# EAGLE board ESP32-COMPACT-VER_v55 (EAGLE 9.7.0)
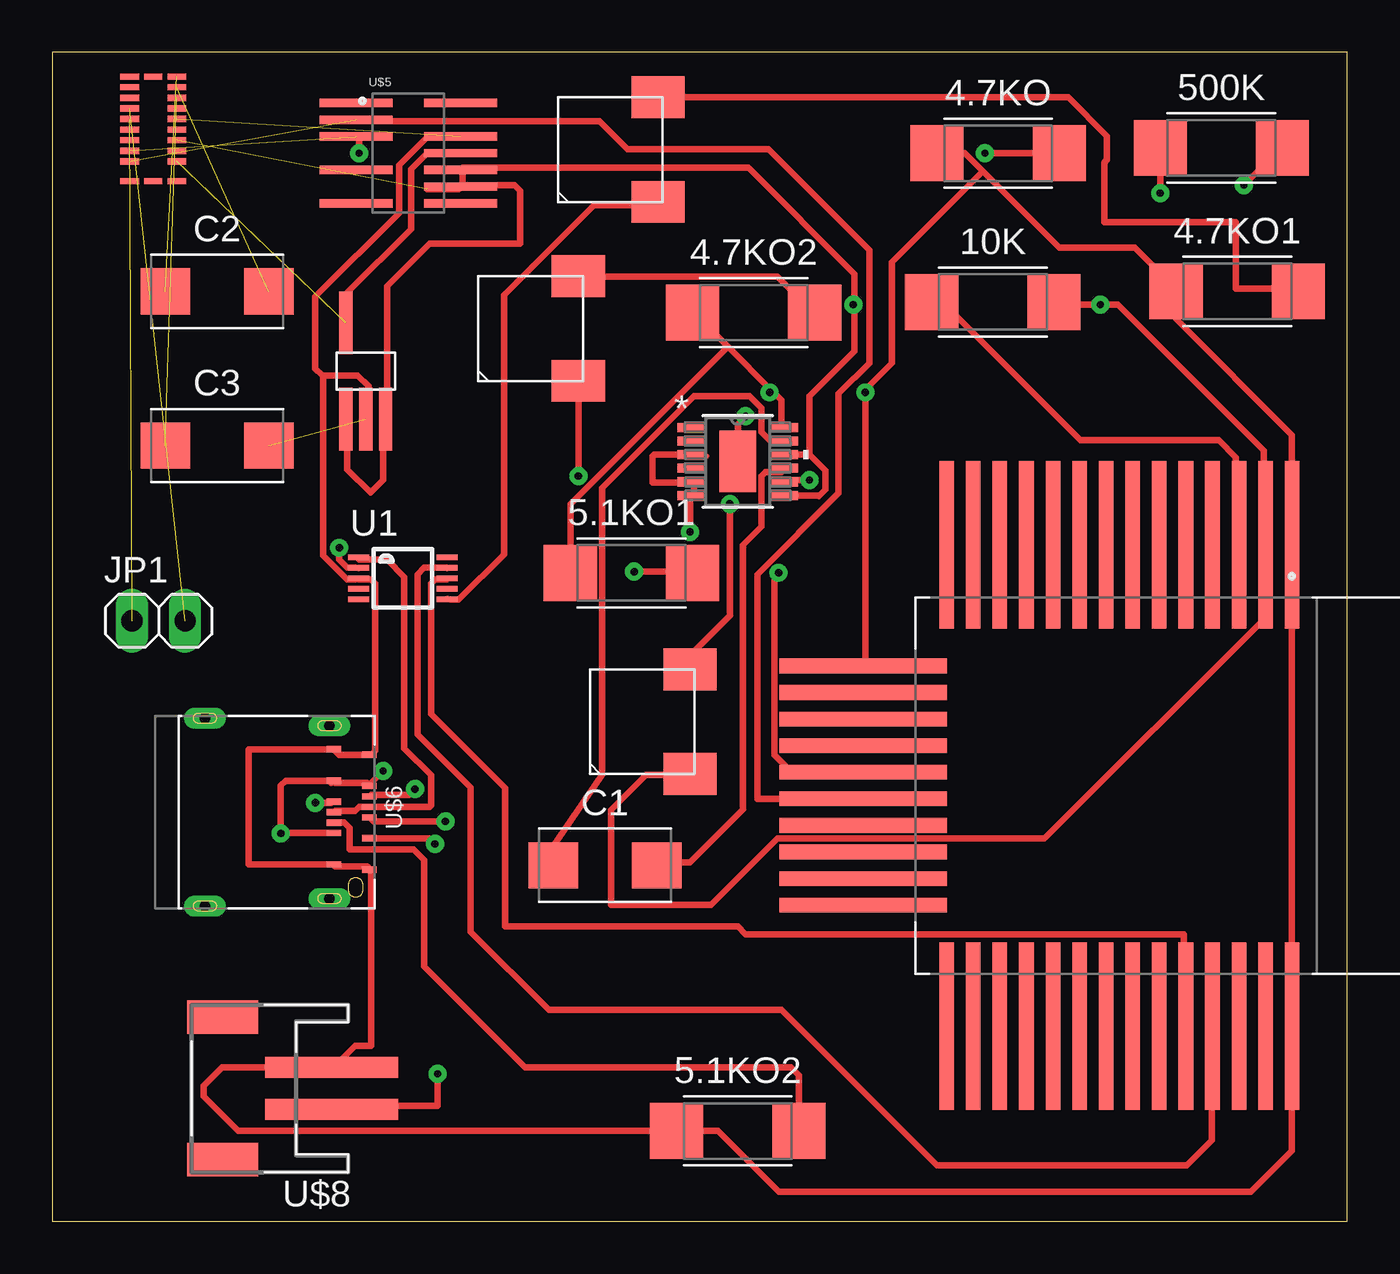
[diagram p0: board, top side]
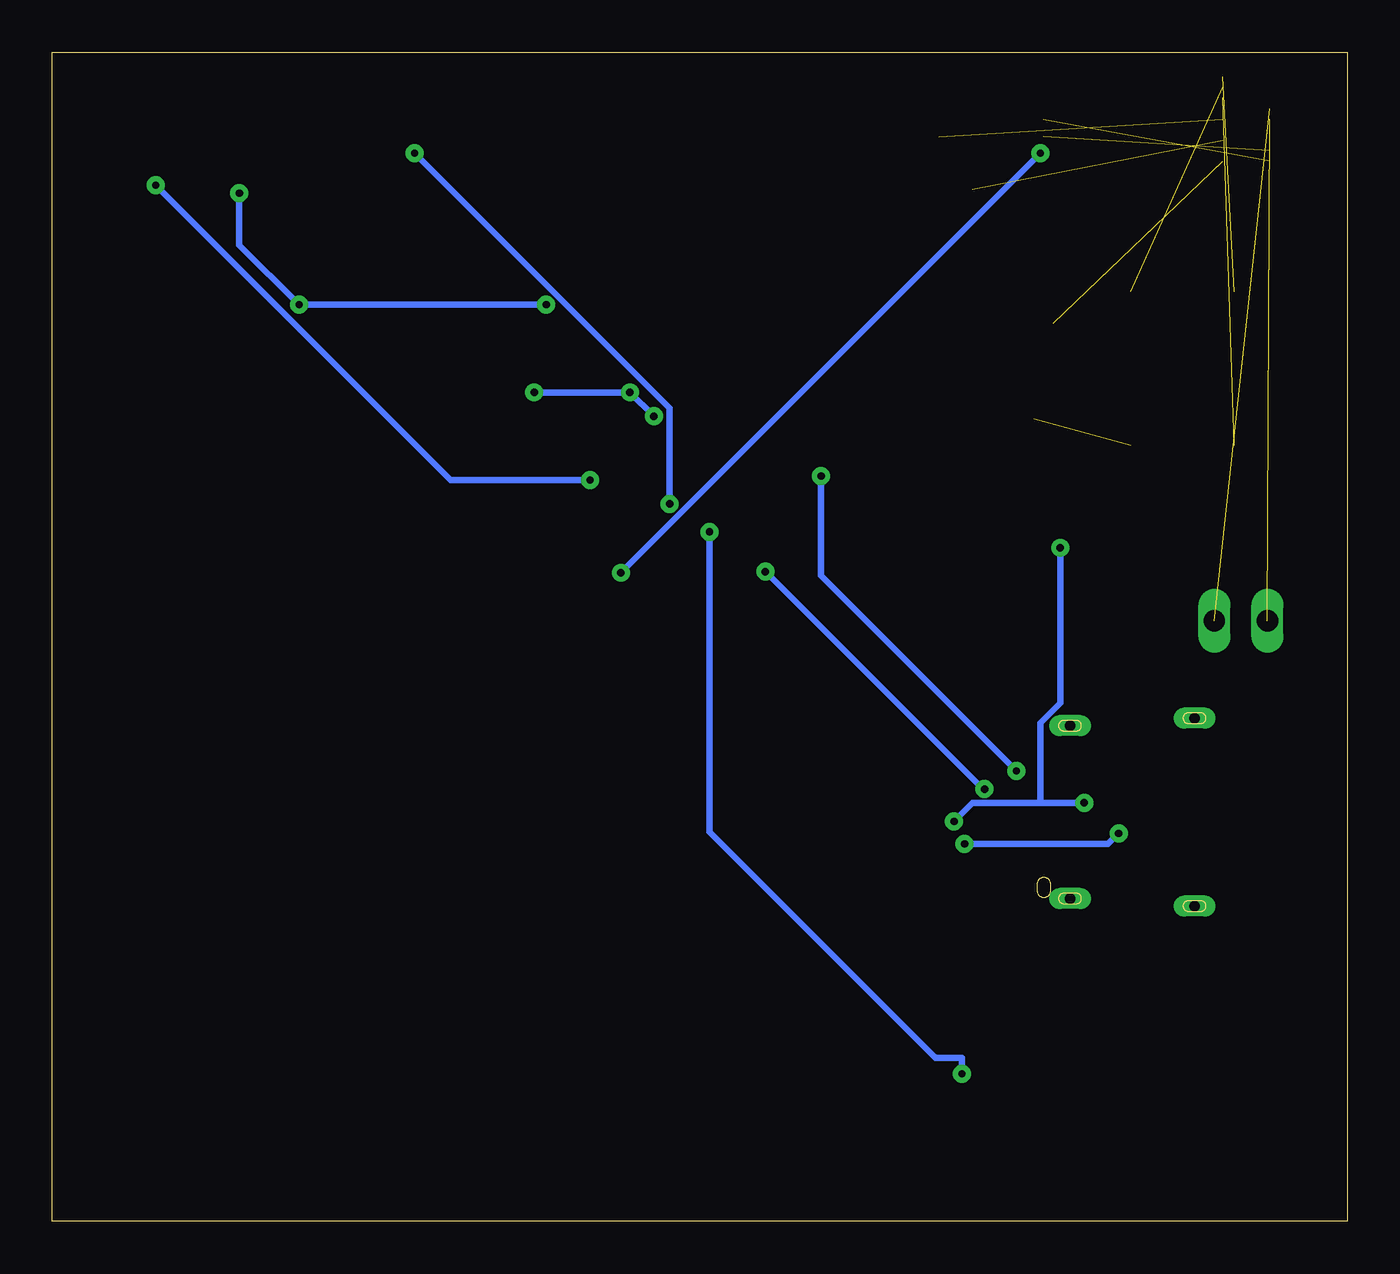
[diagram p1: board, bottom side, seen from below]

Size 61.9 x 55.88 mm. Coordinates in mm from the lower left corner, seen from the top.
Outline: 0,0 61.9,0 61.9,55.88 0,55.88 0,0
Copper layers (1*16): Top 0.035mm / dielectric 1.5mm / Bottom 0.035mm
Design rules "default *": minimum track width 3mil, minimum drill 0.35mm, track to track 3mil, track to pad 3mil, pad to pad 3mil, via to via 3mil, smd to smd 3mil, copper to edge 40mil, drill to drill 6mil, minimum pad ring 10mil, minimum via ring 10mil, stop-mask expansion 4mil, vias tented up to drill 0mil, thermal gap 10mil
Net classes: 0 default: width 0.305 mm

## Footprints (pad centres in the part's own frame; a part is rotated, then mirrored left to right if it is on the bottom)
5025-WIDENED-RESISTOR = smd 2.54 x 2.67: 1 -2.921,0; 2 2.921,0
CAPM6032X280 = smd 2.368 x 2.204: 1 -2.471,0; 2 2.471,0
1X02 = drill 1.016 long: 1 -1.27,0; 2 1.27,0
MSOP10 = smd 1 x 0.25: 1 -2.113,1; 2 -2.113,0.5; 3 -2.113,0; 4 -2.113,-0.5; 5 -2.113,-1; 6 2.113,-1; 7 2.113,-0.5; 8 2.113,0; 9 2.113,0.5; 10 2.113,1
MSOP-12_MSE = smd 1.397 x 0.432: 1 -2.184,1.626; 2 -2.184,0.975; 3 -2.184,0.325; 4 -2.184,-0.325; 5 -2.184,-0.975; 6 -2.184,-1.626; 7 2.184,-1.626; 8 2.184,-0.975; 9 2.184,-0.325; 10 2.184,0.325; 11 2.184,0.975; 12 2.184,1.626 | smd 1.753 x 2.946: 13 0,0
ESP32-WROOM-32 = smd 8 x 0.7: 1 -11.5,5.26; 3V3 -11.5,3.99; EN -11.5,2.72; GND 11.5,5.26; IO0 11.5,-11.25; IO4 11.5,-9.98; IO5 11.5,-6.17; IO12 -11.5,-11.25; IO14 -11.5,-9.98; IO16 11.5,-8.71; IO17 11.5,-7.44; IO18 11.5,-4.9; IO19 11.5,-3.63; IO21 11.5,-1.09; IO22 11.5,2.72; IO23 11.5,3.99; IO25 -11.5,-6.17; IO26 -11.5,-7.44; IO27 -11.5,-8.71; IO32 -11.5,-3.63; IO33 -11.5,-4.9; IO34 -11.5,-1.09; IO35 -11.5,-2.36; NC 11.5,-2.36; RX 11.5,0.18; SENSOR_VN -11.5,0.18; SENSOR_VP -11.5,1.45; TX 11.5,1.45 | smd 0.7 x 8: CLK 0.635,-15.25; CMD -0.635,-15.25; GND2 -5.715,-15.25; IO2 5.715,-15.25; IO13 -4.445,-15.25; IO15 4.445,-15.25; SD0 1.905,-15.25; SD1 3.175,-15.25; SD2 -3.175,-15.25; SD3 -1.905,-15.25
NJM12888 = smd 0.635 x 3: CTRL 0.95,-2.3; GND 0,-2.3; VIN -0.95,-2.3; VOUT -0.95,2.3
5MM-SQUARED-LED = smd 2.54 x 2: P$1 2.286,-2.5; P$2 2.286,2.5
MAX30102-WIDENED = smd 3.5 x 0.4: 1 -2.5,2.4; 5 -2.5,-0.8; 7 -2.5,-2.4; 8 2.5,-2.4; 14 2.5,2.4; GND 2.5,0.8; SCL -2.5,1.6; SDA -2.5,0.8; VDD 2.5,0; VLED1 2.5,-0.8; VLED2 2.5,-1.6
TYPE-C-MIN = smd 0.3 x 0.7: A1 -2.75,5; A4 -1.25,5; A5 -0.75,5; A6 -0.25,5; A7 0.25,5; A9 1.25,5; A12 2.75,5; B1 2.5,3.3; B4 1,3.3; B5 0.5,3.3; B6 0,3.3; B7 -0.5,3.3; B9 -1.5,3.3; B12 -3,3.3 | drill 0.5 pad 0.8 long: SH1 -4.13,3.09; SH2 4.13,3.09; SH3 4.49,-2.86; SH4 -4.49,-2.86
JSTPH2 = smd 1 x 6.35: GND 1,-3.7; VDD -1,-3.7 | smd 1.6 x 3.4: NC1 -3.4,1.5; NC2 3.4,1.5
MAX86150 = smd 0.9 x 0.3: C1_N 1.13,1.519; C1_P 1.13,2.025; ECG_N -1.13,0.506; ECG_P -1.13,0; GND_ANALOG 1.13,0.506; GND_DIGITAL 1.13,0; INTB -1.13,-1.012; P$1 -1.13,2.025; P$2 -1.13,1.012; P$4 -1.13,1.519; P$14 -1.13,-0.506; P$20 -1.13,-2.975; P$21 1.13,-2.975; PGND 1.13,-0.506; SCL -1.13,-2.025; SDA -1.13,-1.519; VDD_ANALOG 1.13,-1.519; VDD_DIGITAL 1.13,-2.025; VLED 1.13,-1.012; VREF 1.13,1.012 | smd 0.85 x 0.3: P$19 0,-2.975; P$27 0,2.025

## Placement (x,y rotation side)
4.7KO  5025-WIDENEDRESISTOR  [5025-WIDENED-RESISTOR]  45.21,51.05 0 top
4.7KO1  5025-WIDENEDRESISTOR  [5025-WIDENED-RESISTOR]  56.64,44.45 0 top
4.7KO2  5025-WIDENEDRESISTOR  [5025-WIDENED-RESISTOR]  33.53,43.43 0 top
5.1KO1  5025-WIDENEDRESISTOR  [5025-WIDENED-RESISTOR]  27.69,30.99 0 top
5.1KO2  5025-WIDENEDRESISTOR  [5025-WIDENED-RESISTOR]  32.77,4.32 0 top
10K  5025-WIDENEDRESISTOR  [5025-WIDENED-RESISTOR]  44.96,43.94 0 top
500K  5025-WIDENEDRESISTOR  [5025-WIDENED-RESISTOR]  55.88,51.31 0 top
C1  1uF  [CAPM6032X280]  26.42,17.02 0 top
C2  1uF  [CAPM6032X280]  7.87,44.45 0 top
C3  1uF  [CAPM6032X280]  7.87,37.08 0 top
JP1  PINHD-1X2  [1X02]  5.08,28.7 0 top
U1  CH340ESMD  [MSOP10]  16.76,30.73 0 top
U2  LTC3245IMSETRPBF  [MSOP-12_MSE]  32.77,36.32 0 top
U$1  ESP32-WROOM-32  [ESP32-WROOM-32]  54,20.83 270 top
U$2  NJM12888  [NJM12888]  14.99,40.64 0 top
U$3  5MM-SQUARED-LED  [5MM-SQUARED-LED]  26.67,51.23 0 top
U$4  5MM-SQUARED-LED  [5MM-SQUARED-LED]  22.86,42.67 0 top
U$5  MAX30102  [MAX30102-WIDENED]  17.02,51.05 0 top
U$6  TYPE-C-MIN  [TYPE-C-MIN]  10.16,19.56 270 top
U$7  5MM-SQUARED-LED  [5MM-SQUARED-LED]  28.19,23.88 0 top
U$8  JSTPH2-WIDE  [JSTPH2]  9.65,6.35 90 top
U$9  MAX86150  [MAX86150]  4.83,52.69 0 top

## Library data of the parts
4.7KO 4.7KO1 4.7KO2 5.1KO1 5.1KO2 10K 500K U$1-U$9 = esp32-component-libraries
C1-C3 = Capacitor; CATEGORY: Capacitor
JP1 = Connector; CATEGORY: CONNECTOR; SUB-CATEGORY: PIN-HEADER
U1 = CH340E
U2 = LTC3245IMSETRPBF; MANUFACTURER_PART_NUMBER: ltc3245imse#trpbf; VENDOR: Linear Technology

## Nets
GND: 4.7KO1.1 4.7KO2.1 4.7KO.1 5.1KO1.1 5.1KO2.1 C3.2 U1.3 U2.12 U2.13 U$1.1 U$1.GND U$1.GND2 U$2.GND U$5.GND U$6.A1 U$6.A12 U$6.B1 U$6.B12 U$8.GND U$9.GND_DIGITAL
N$1: 10K.2 500K.1 U2.7 U2.10 U$1.3V3 U$2.CTRL U$2.VIN U$5.VLED1 U$5.VLED2 U$7.P$1 U$9.VLED
N$2: U1.9 U$1.TX
N$3: U1.8 U$1.RX
N$4: 4.7KO.2 U$7.P$2
N$5: U$1.CLK U$5.SCL U$9.SCL
N$6: 10K.1 U$1.EN
N$7: U$1.CMD U$5.SDA U$9.SDA
N$8: C2.1 U$9.C1_P
N$9: U1.6 U$3.P$1
N$10: 4.7KO1.2 U$3.P$2
N$11: U1.1 U$6.A6 U$6.B6
N$12: 4.7KO2.2 U$4.P$2
N$13: U1.2 U$6.A7 U$6.B7
N$14: U2.3 U2.5 U2.6 U$8.VDD
N$15: C1.2 U2.9
N$16: C1.1 U2.11
N$17: 500K.2 U2.8
N$18: U$4.P$1 U$6.A4 U$6.A9 U$6.B4 U$6.B9
N$19: 5.1KO2.2 U$6.B5
N$20: 5.1KO1.2 U$6.A5
N$21: C2.2 U$9.C1_N
N$22: U$2.VOUT U$5.VDD U$9.VDD_DIGITAL
N$23: C3.1 U$9.VREF
N$24: JP1.2 U$9.ECG_N
N$25: JP1.1 U$9.ECG_P
V3: U1.10
VCC: U1.7

## Tracks (layer width: path | path; a pad name or v marks a point on that pad's centre or on a via)
GND  (via drill 0.35)  (2 unrouted)
  Top 0.305: U$5.GND 19.43,51.82 17.91,51.82 16.57,50.48 16.57,48.2 12.57,44.2 12.57,40.77 12.92,40.42 | 12.92,40.42 12.95,40.39 12.95,31.81 14.1,30.67 14.48,30.67 U1.3 14.67,30.67 15.24,30.67 15.43,30.48 15.43,22.48 15.24,22.29 U$6.A1 15.05,22.29 13.72,22.29 13.53,22.48 U$6.B12 9.4,22.56 9.4,17.06 U$6.B1 13.53,16.95 15.05,16.95 U$6.A12 15.24,16.76 15.24,8.38 14.48,8.38 13.53,7.43 U$8.GND 8.14,7.35 8.13,7.37 7.24,6.48 7.24,5.97 8.89,4.32 5.1KO2.1 31.81,4.32 34.74,1.4 57.29,1.41 59.25,3.37 59.25,9.31 U$1.GND 59.25,9.34 59.25,32.19 U$1.1 59.25,32.38 59.25,37.59 53.72,43.12 4.7KO1.1 53.72,44.58 51.75,46.55 48.13,46.55 44.48,50.2 | 32.29,41.81 30.67,43.43 4.7KO2.1 | 32.29,41.81 34.38,39.72 | 34.38,39.72 34.86,39.24 34.86,38.1 U2.12 | 5.1KO1.1 24.77,34.29 32.29,41.81 | U2.13 32.77,38.1 v33.15,38.48 | v34.29,39.62 34.38,39.72 | 4.7KO.1 43.62,51.05 44.48,50.2 | 44.48,50.2 40.13,45.85 40.13,41.02 38.86,39.75 v38.86,39.62 38.86,26.67 U$1.GND2 | 12.92,40.42 14.61,40.42 15.11,39.91 15.11,38.47 U$2.GND
  Bottom 0.305: v33.15,38.48 v34.29,39.62 v38.86,39.62
N$1  (via drill 0.35)  (1 unrouted)
  Top 0.305: U$2.VIN 14.1,38.29 14.1,35.94 15.21,34.83 15.81,35.43 15.81,38.29 U$2.CTRL 16,38.48 16,44.7 18.03,46.74 22.35,46.74 22.35,49.28 22.1,49.53 19.62,49.53 | 36.2,36.64 36.29,36.54 36.96,35.88 36.96,34.99 36.64,34.67 36.61,34.7 U2.7 35.05,34.67 | 35.05,36.58 U2.10 36.19,36.65 36.2,36.64 | 36.2,36.64 36.2,39.43 38.35,41.59 38.35,43.75 v38.29,43.81 38.35,43.88 38.35,45.28 33.27,50.35 19.62,50.35 19.62,50.1 | 19.62,50.1 19.62,49.53 | 19.62,49.53 U$5.VLED2 19.43,49.34 17.91,49.34 | 19.62,50.1 U$5.VLED1 | U$7.P$1 30.48,21.34 28.38,21.34 26.71,19.66 26.71,15.11 31.5,15.11 34.67,18.29 47.43,18.29 57.91,28.77 57.91,32.19 U$1.3V3 57.91,32.38 57.91,36.83 50.93,43.81 v50.1,43.81 50.01,43.72 49.91,43.81 48.01,43.81 10K.2 | v52.96,49.15 500K.1
  Bottom 0.305: v52.96,49.15 52.96,46.67 v50.1,43.81 v38.29,43.81
N$2
  Top 0.305: U1.9 18.86,31.24 17.78,31.24 17.46,30.92 17.46,23.27 20,20.73 20,13.84 23.75,10.1 34.86,10.1 42.29,2.67 54.23,2.67 55.43,3.87 55.43,9.14 U$1.TX
N$3
  Top 0.305: U1.8 18.86,30.67 18.29,30.67 18.1,30.48 18.1,24.26 21.65,20.7 21.65,14.1 32.77,14.1 33.15,13.72 54.1,13.72 54.1,9.34 U$1.RX
N$4  (via drill 0.35)
  Top 0.305: U$7.P$2 30.48,27.05 32.38,28.96 v32.38,34.29 | 4.7KO.2 v44.58,51.05
  Bottom 0.305: v32.38,34.29 32.38,38.86 v44.58,51.05
N$5  (1 unrouted)
  Top 0.305: U$1.CLK 33.72,20.19 33.72,30.92 37.59,34.8 37.59,39.56 39.05,41.02 39.05,46.42 34.23,51.24 27.5,51.24 26.16,52.58 14.67,52.58 U$5.SCL
N$6
  Top 0.305: 10K.1 42.1,43.81 42.67,43.81 49.15,37.34 55.75,37.34 56.58,36.51 56.58,32.38 U$1.EN
N$7  (via drill 0.35)  (1 unrouted)
  Top 0.305: v14.67,51.05 14.67,51.82 U$5.SDA | U$1.CMD 38.67,21.53 35.29,21.53 34.52,22.29 34.52,30.8 v34.72,31
  Bottom 0.305: v34.72,31 v14.67,51.05
N$8  (1 unrouted)
N$9
  Top 0.305: U1.6 19.05,29.72 19.43,29.72 21.59,31.88 21.59,44.26 25.91,48.58 28.96,48.58 U$3.P$1
N$10
  Top 0.305: U$3.P$2 29.15,53.72 48.58,53.72 50.42,51.88 50.42,50.74 50.29,50.61 50.29,47.75 56.58,47.75 56.58,44.58 59.44,44.58 4.7KO1.2
N$11
  Top 0.305: U$6.B6 13.53,19.62 14.48,19.62 14.67,19.81 15.05,19.81 U$6.A6 15.24,19.81 18.03,19.81 18.1,19.88 18.1,21.34 16.83,22.61 16.83,30.8 16,31.62 14.67,31.62 U1.1
N$12
  Top 0.305: U$4.P$2 25.15,45.15 34.67,45.15 36.39,43.43 4.7KO2.2
N$13  (via drill 0.35)
  Top 0.305: v12.57,20 13.34,20 U$6.B7 | v18.8,19.11 15.37,19.11 15.24,19.24 U$6.A7 | v13.72,32.19 13.72,31.62 14.1,31.24 14.48,31.24 U1.2
  Bottom 0.305: 14.67,20 17.91,20 v18.8,19.11 | 14.67,20 v12.57,20 | v13.72,32.19 13.72,24.77 14.67,23.81 14.67,20
N$14  (via drill 0.35)
  Top 0.305: 31.24,36.58 30.67,36.58 U2.3 28.77,36.65 28.7,36.58 28.7,35.31 30.54,35.31 30.67,35.43 U2.5 30.67,35.24 30.67,34.86 U2.6 30.48,34.67 v30.48,32.96 | v18.41,7.05 18.41,5.52 13.53,5.52 U$8.VDD
  Bottom 0.305: v30.48,32.96 30.48,18.61 19.68,7.81 18.41,7.81 v18.41,7.05
N$15
  Top 0.305: U2.9 34.86,35.81 34.1,35.81 33.91,35.62 33.91,33.21 33.02,32.32 33.02,19.68 30.48,17.14 28.89,17.14 C1.2
N$16
  Top 0.305: U2.11 34.86,37.34 34.29,37.34 33.91,37.72 33.91,38.86 33.34,39.43 30.67,39.43 26.29,35.05 26.29,21.34 23.95,17.92 C1.1
N$17  (via drill 0.35)
  Top 0.305: v36.2,35.43 35.05,35.43 U2.8 | v56.96,49.53 58.67,51.24 500K.2
  Bottom 0.305: v36.2,35.43 42.86,35.43 v56.96,49.53
N$18  (via drill 0.35)
  Top 0.305: 15.05,18.29 U$6.A9 18.01,18.31 v18.29,18.03 | U$6.B9 13.53,20.95 15.05,20.95 U$6.A4 15.24,20.95 v15.81,21.53 | 13.34,20.95 U$6.B9 | v25.15,35.62 U$4.P$1 | U$6.B4 10.94,18.56 v10.92,18.54 10.92,20.83 11.15,21.06 U$6.B9
  Bottom 0.305: v25.15,35.62 25.15,30.86 v15.81,21.53 | v18.29,18.03 11.43,18.03 v10.92,18.54
N$19
  Top 0.305: U$6.B5 13.96,19.06 14.22,18.8 14.22,17.78 17.27,17.78 17.78,17.27 17.78,12.19 22.61,7.37 35.31,7.37 35.69,6.99 5.1KO2.2
N$20  (via drill 0.35)
  Top 0.305: v27.81,31.05 30.48,31.05 5.1KO1.2 | U$6.A5 15.24,20.38 17.06,20.38 v17.34,20.66
  Bottom 0.305: v27.81,31.05 17.42,20.66 v17.34,20.66
N$21  (1 unrouted)
N$22  (1 unrouted)
  Top 0.305: U$5.VDD 17.91,51.05 17.14,50.29 17.14,47.43 14.1,44.39 14.1,43.05 U$2.VOUT
N$23  (1 unrouted)
N$24  (1 unrouted)
N$25  (1 unrouted)